# Altium PCB HHO.PcbDoc
Units mm, origin at the board's own origin, x right, y up, seen from the top; angles counter-clockwise.
Board outline 152.4 x 101.6 mm, 2 copper layers (Top Layer, Bottom Layer); 98 components, 57 nets, 291 pads, 184 vias.
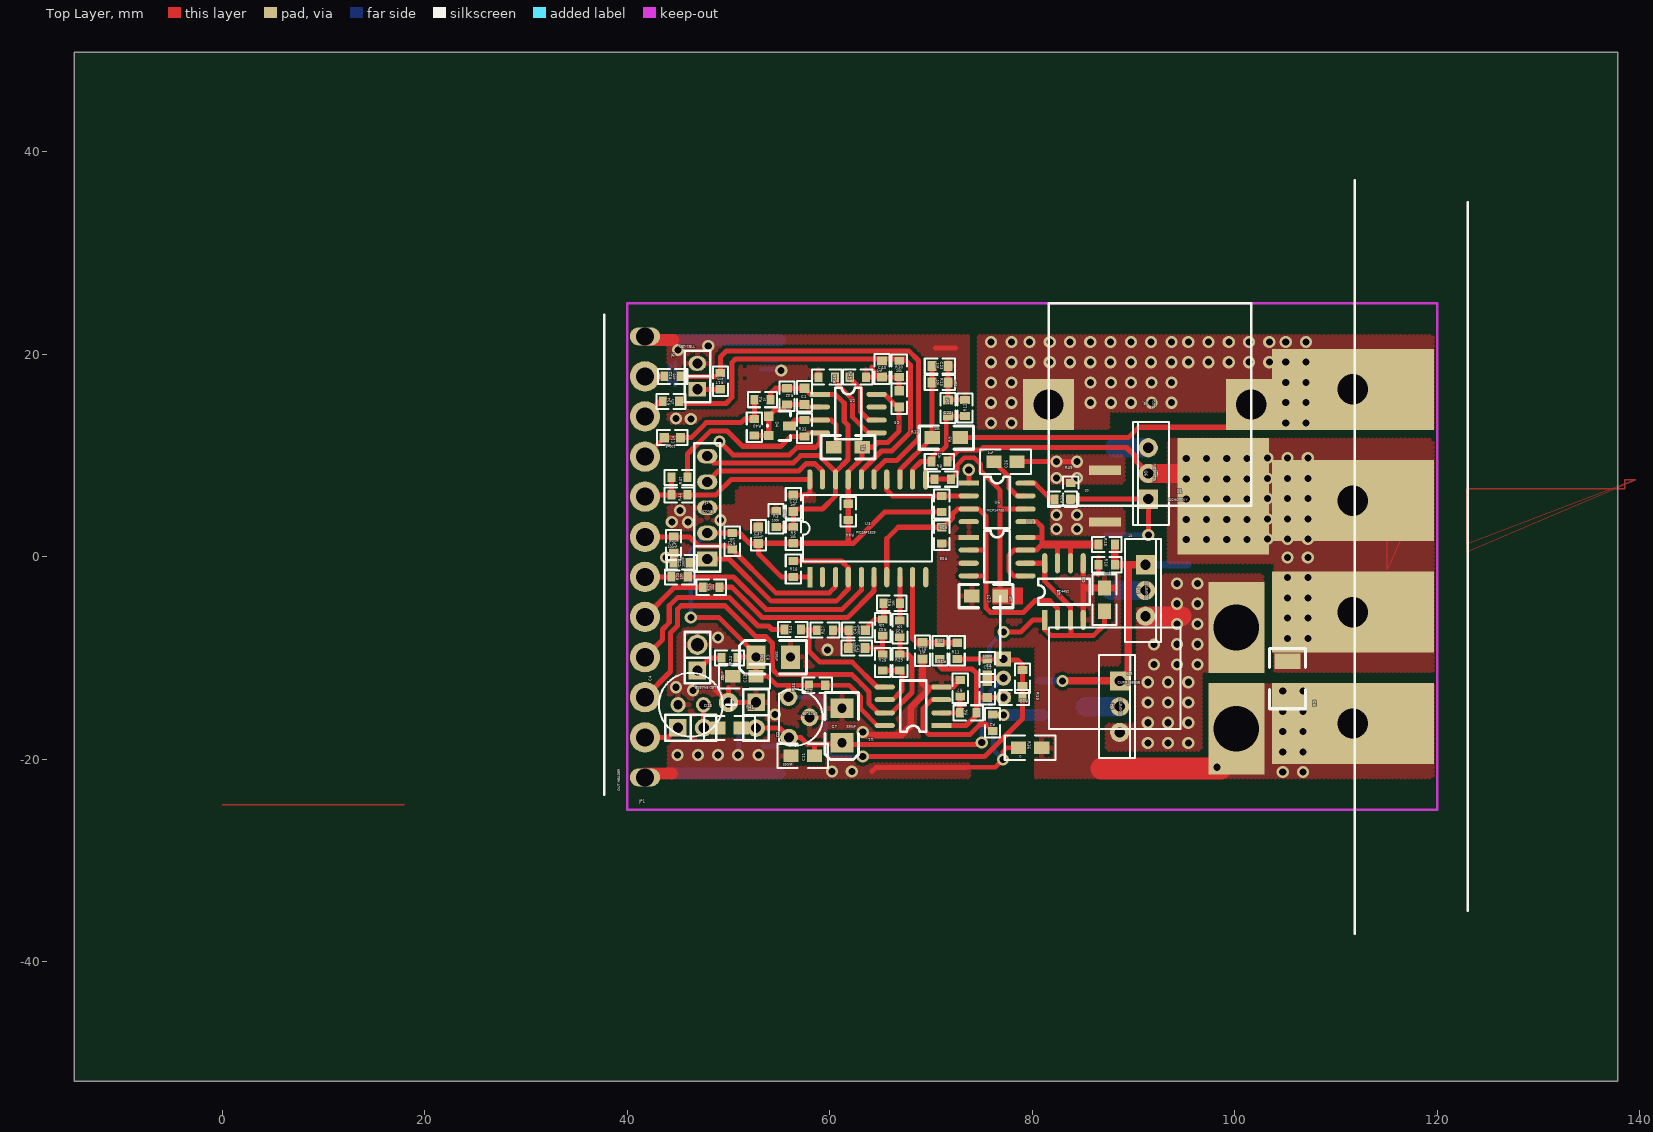
[diagram p0: Top Layer view]
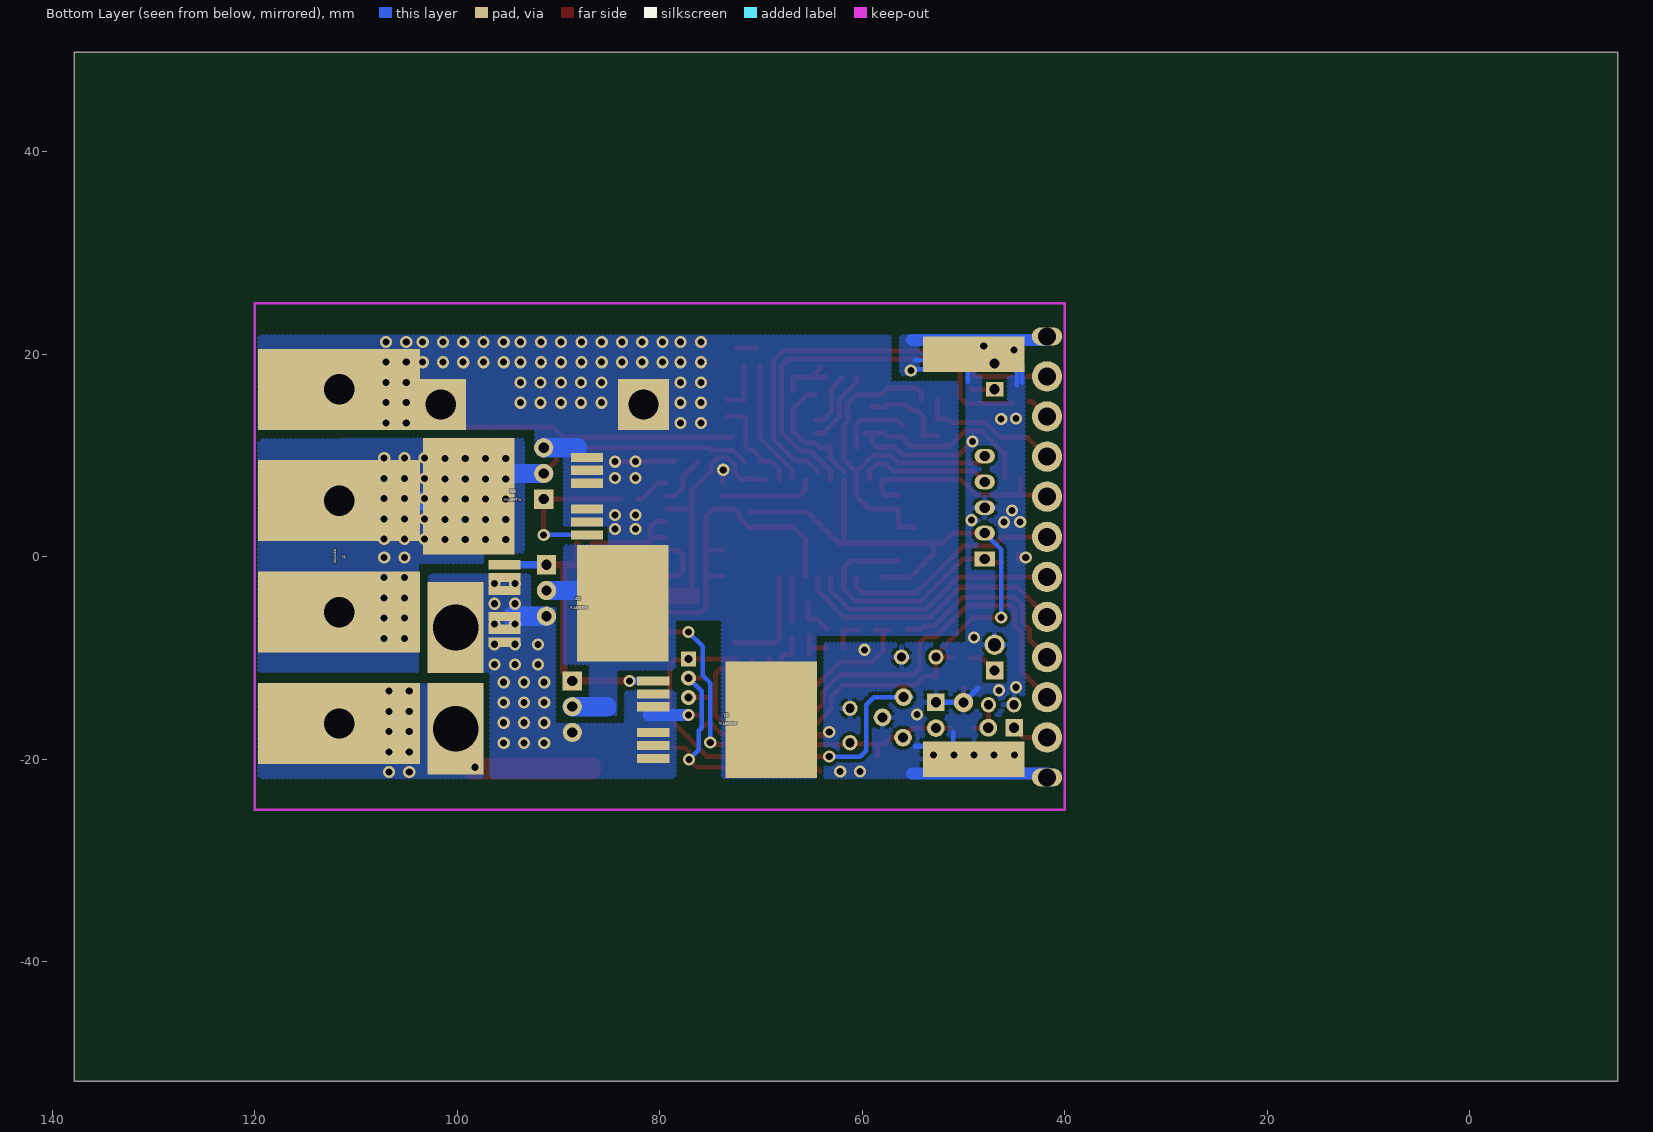
[diagram p1: Bottom Layer view, seen from below]

## Layer stack, top to bottom
Top Layer: signal copper 0.0356
Dielectric: dielectric 0.32, FR-4, Dk 4.8
Bottom Layer: signal copper 0.0356

## Board outline
-14.6,-51.8 137.8,-51.8 137.8,49.8 -14.6,49.8

## Design rules (kind name [scope] priority, off if disabled: settings)
Clearance "Clearance Keepout" [OnLayer('Keep-Out Layer')] p1: gap=0
Clearance [All] p2: gap=0.3
Clearance "Clearance Polygon" [All vs (IsPolygon)] p3: gap=0.5
ComponentClearance [All] p1 off: gap=0 collisioncheckmode=2
HoleSize [All] p1: absolutevalues=TRUE maxlimit=5 minlimit=0.7 maxpercent=80.000 minpercent=20.000
PolygonConnect PolygonConnect_PGND [InNet('PGND')] p1: connectstyle=Relief reliefconductorwidth=0.5 reliefentries=4 polygonreliefangle="90 Angle"
PolygonConnect PolygonConnectGND [InNet('GND')] p2: connectstyle=Relief reliefconductorwidth=0.5 reliefentries=4 polygonreliefangle="90 Angle"
PolygonConnect [All] p3: connectstyle=Direct reliefconductorwidth=0.5 reliefentries=4 polygonreliefangle="90 Angle"
RoutingLayers [All] p1: top layer=Horizontal bottom layer=Vertical
RoutingVias [All] p1: holewidth=0.711 width=1.27 viastyle="Through Hole" minholewidth=0.711 minwidth=1.27 maxholewidth=0.711 maxwidth=1.27
SolderMaskExpansion [All] p1: expansion=0.102
TestPointUsage [All] p1: valid=0 allowmultiple=FALSE
Testpoint [All] p1: side=15 testpointundercomponent=TRUE minsize=1.016 maxsize=2.54 preferedsize=1.524 minholesize=0 maxholesize=1.016 preferedholesize=0.813 testpointgrid=0.025 style=1023 order=1234567890
Width [All] p1: maxlimit=5 minlimit=0.254 preferedwidth=0.254 toplayer_minwidth=0.45 toplayer_prefwidth=0.5 bottomlayer_minwidth=0.45 bottomlayer_prefwidth=0.45 minimp=50.000000 maximp=50.000000 favimp=50.000000
15 further rules are at their usual default settings.

## Components (designator, comment, footprint, x,y, rotation, side; value= is the part's Value field where it differs from the comment)
C1 "470pF" "0603 CAP" 57.5,15.825 r90 top
C2 "100nF" "0603 CAP" 75.55,-13.1 r90 top (schematic designator C?)
C3 "1uF" 0805 87.125,-5.4 r90 top (schematic designator C?)
C4 "330uF" "RA 6.3MM" 47.525,-14.625 r180 top
C5 "100nF" "0603 CAP" 66.85,15.575 r270 top
C6 "1uF" 1210 105.2,-10.325 r270 top
C7 "330uF" "3528 + RA 6.3mm NOT ROUND" 61.2,-18.375 r270 top
C8 "330uF" "3528 + RA 6.3mm NOT ROUND" 52.725,-9.925 r180 top
C11 "330nF" 0805 58.475,-19.675 r180 top
C12 "100nF" 0805 52.725,-11.825 r180 top
C14 "100nF" "0603 CAP" 44.45,11.75 r0 top
C18 "1nF" "0603 CAP" 69.15,-9.3 r270 top
C19 "100nF" "0603 CAP" 75.55,-10.9 r270 top
C21 "1nF" "0603 CAP" 56.4,5.275 r90 top
C22 "1nF" "0603 CAP" 71.675,14.675 r90 top
C23 "1nF" "0603 CAP" 70.875,18.825 r0 top
C24 "100nF" "0603 CAP" 45.4,-0.6 r180 top
C26 "1uF" 0805 76.2,9.375 r0 top
C27 "1uF" 1005 76.825,-3.9 r180 top
C36 "100nF" "0603 CAP" 44.575,1.15 r270 top
C37 "100nF" "0603 CAP" 52.95,2.1 r90 top
C40 "100nF" "0603 CAP" 62.7,-7.25 r180 top
C41 "100nF" "0603 CAP" 62.675,-9.025 r180 top
C43 "1nF" "0603 CAP" 65.15,18.525 r270 top
D1 "SCHOTTKY" "D2-Pack - 3 - DIODE" 87.175,5.975 r0 top
D2 "ZENER1" SIP2#1 52.725,-14.375 r270 top
D3 "" "D2-Pack - 3 - DIODE" 87.175,5.975 r0 bottom (schematic designator D?)
D4 "DUAL DIODE BAV99" SOT-23 53.975,13.875 r270 top
D18 "DIODE" SIP2#1 45,-16.9 r0 top
J1 "CON5" SIP5 47.9,-0.225 r90 top
J2 "IOLOAD" "HD 11mm 4P HAMMOND" 111.647,16.525 r270 bottom
J3 "LED ENABLE" SIP2#2 46.925,-11.25 r90 top
J4 "COIL" "SIP2 - INDUCTOR 20A" 81.6,15.025 r0 top
J6 "LED CELL" SIP2#3 46.925,16.525 r90 top
JP1 "OUT HEADER" PWD12R 41.75,-21.8 r90 top
Q1 "MOSFET N" "D2-Pack - 7" 80.65,-16.1 r180 bottom
Q2 "MOSFET N" "D2-Pack - 7" 95.325,-4.625 r180 bottom
Q3 "MOSFET N" "D2-Pack - 7" 87.175,5.975 r0 bottom
Q4 "MOSFET N" TO220 88.625,-12.275 r270 top
Q5 "MOSFET N" TO220 91.175,-0.8 r270 top
Q6 "MOSFET N" TO220 91.45,5.675 r90 top
R1 "10k" 1005 63.2,10.8 r180 top
R2 "10k" "0603 RES" 76.075,-16.4 r90 top
R3 "100k" "0603 RES" 54.7,3.725 r270 top
R4 "1k" "0603 RES" 53.35,15.5 r180 top
R5 "10k" "0603 RES" 56.4,2.125 r90 top
R6 "10k" "0603 RES" 73.675,-15.425 r180 top
R7 "10k" "0603 RES" 72.875,-13 r90 top
R8 "10k" "0603 RES" 70.825,9.4 r180 top
R9 "10k" 1005 72.9,11.75 r180 top
R10 "10k" "0603 RES" 87.35,-0.8 r0 top
R11 "1k" "0603 RES" 72.575,-9.3 r90 top (schematic designator R?)
R12 "10k" "0603 RES" 73.35,14.675 r90 top
R13 "10k" 0603 70.875,17.2 r0 top
R14 "100k" "0603 RES" 56.349,-7.199 r180 top (schematic designator R?)
R15 "10" "0603 RES" 87.35,1.2 r0 top
R16 "1k" "0603 RES" 70.875,-9.3 r270 top
R17 "470" "0603 RES" 49.2,17.325 r270 top
R18 "10k" "0603 RES" 56.4,-1.225 r90 top
R19 "0" "0603 RES" 78.225,-13.9 r0 top
R20 "20" "0603 RES" 82.975,5.675 r0 top
R21 "10k" "0603 RES" 50.375,1.525 r270 top
R22 "470" "0603 RES" 44.475,17.8 r180 top
R23 "0" "0603 RES" 79.025,-12 r270 top
R24 "470" "0603 RES" 50.1,-10 r0 top
R25 "100" "0603 RES" 45.175,-2 r0 top
R26 "100" "0603 RES" 48.3,-3.025 r0 top
R27 "100k" "0603 RES" 59.525,-7.25 r180 top (schematic designator R?)
R28 "100k" "0603 RES" 65.225,-10.45 r270 top (schematic designator R?)
R29 "100k" "0603 RES" 66.925,-10.45 r270 top (schematic designator R?)
R30 "20k" "0603 RES" 66.85,18.525 r90 top
R31 "10k" "0603 RES" 66.125,-4.6 r0 top
R32 "10k" "0603 RES" 65.225,-7 r90 top
R33 "10k" "0603 RES" 57.5,12.675 r90 top
R34 "47k" "0603 RES" 44.325,15.325 r180 top
R35 "10k" "0603 RES" 66.925,-7.125 r90 top (schematic designator R?)
R36 "0" 0805 78.625,-18.875 r0 top
R37 "0" "0603 RES" 71.15,7.65 r0 top (schematic designator R?)
R38 "10k" "0603 RES" 71.05,2.1 r270 top
R39 "10k" "0603 RES" 71.05,5.2 r270 top
R40 "5k1" "0603 RES" 52.55,12.775 r270 top
R41 "100" 0805 48.95,-16.925 r0 top (schematic designator R?)
R42 "100k" "0603 RES" 55.775,15.825 r270 top (schematic designator R?)
R43 "0" "0603 RES" 58.75,-12.7 r180 top
R44 "0" "0603 RES" 61.825,4.425 r270 top
R45 "10k" "0603 RES" 59.7,17.725 r0 top
R46 "10k" "0603 RES" 62.775,17.725 r180 top
R47 "0" "0603 RES" 45.15,7.825 r180 top (schematic designator R?)
R48 "0" "0603 RES" 45.15,6.1 r180 top (schematic designator R?)
R49 "10k" "0603 RES" 83.8,6.475 r90 top
U1 "DUAL OPAMP" SO-8 71.025,-16.675 r180 top
U2 "DUAL OPAMP" SO-8 59.025,16.025 r0 top
U3 "PIC16F1828" SOIC20WIDE 58.025,-2.025 r90 top
U4 "TC4452" SO-8 81.225,-6.25 r90 top
U5 "CURR_SENSE" "5-CB WIDE" 77.15,-12 r0 top
U6 "MCP14700" SO-8 73.725,7.25 r0 top (schematic designator U7)
U7 "LM78L05" "TO-92 WIDE" 56.45,-15.875 r90 top
U8 "DRVFET_LowDual" SO-8 73.725,1.9 r0 top

## Footprints (in the part's own frame and the unit in brackets; to place one, negate y for a bottom-side part, rotate by r counter-clockwise, add the part's x,y. Pads: shape width x height; smd on the part's side, far side on the other; paste and mask are expansions set on the pad)
"5-CB WIDE" [mm]
  rect 1.5x1.5 hole 0.8: 1(0,1.9)
  round 1.5 hole 0.8: 2(0,0) 3(0,-1.9)
  rect 5.5x9 hole 4.5: 4(23,-5) 5(23,5)
  silkscreen extent 4.5,-5 17.5,5
0603 [mm]
  rect 0.9x0.95 smd: 1(-0.8,0) 2(0.8,0)
  silkscreen extent -1.5,-0.75 1.5,0.75
"0603 CAP" [mm]
  rect 0.9x0.95 smd: 1(-0.8,0) 2(0.8,0)
  silkscreen extent -1.5,-0.75 1.5,0.75
"0603 RES" [mm]
  rect 0.8x0.95 smd: 1(-0.8,0) 2(0.8,0)
  silkscreen extent -1.45,-0.75 1.45,0.75
0805 [mm]
  rect 1.5x1.25 smd: 1(0,0) 2(2.3,0)
  silkscreen extent -1.35,-1.2 3.65,1.2
1005 [mil]
  rect 60x50 smd: 1(0,0) 2(110,0)
  silkscreen extent -50,-45 160,45
1210 [mil]
  rect 60x100 smd: 1(0,0) 2(135,0)
  silkscreen extent -50,-70 185,70
"3528 + RA 6.3mm NOT ROUND" [mm]
  rect 1.9x2.3 smd: 1(0,0) 2(-3.4,0)
  round 1.5 hole 0.9: 1(0,0) 2(-3.4,0)
  silkscreen extent -4.95,-1.65 1.65,1.65
"D2-Pack - 3 - DIODE" [mm]
  rect 3.2x0.9 smd: 1(0,2.55) 1(0,-2.55)
  rect 9x11.5 smd: 2(11.675,0)
"D2-Pack - 7" [mm]
  rect 3.2x0.9 smd: 1(0,3.825) 3(0,-3.825) 3(0,-2.55) 3(0,-1.275) 3(0,1.275) 3(0,2.55)
  rect 9x11.5 smd: 2(11.675,0)
"HD 11mm 4P HAMMOND" [mm]
  rect 8x16 hole 3: 1(0,0) 2(11,0) 3(22,0) 4(33,0)
PWD12R [mm] "12 Pin 3.96mm Header"
  oval 1.8x3 hole 1.8: 1(0,0) 12(43.55,0)
  round 3 hole 1.8: 2(3.95,0) 3(7.925,0) 4(11.875,0) 5(15.85,0) 6(19.8,0) 7(23.75,0) 8(27.725,0) 9(31.675,0) 10(35.65,0) 11(39.6,0)
  silkscreen extent -1.7,4 45.7,4
"RA 6.3MM" [mm]
  round 1.5 hole 0.9: 1(0,0) 2(2.5,0)
  silkscreen extent -3.27,-3.15 4.4,3.15
SIP2#1 [mm]
  rect 1.75x1.75 hole 1: 1(0,0)
  round 1.75 hole 1: 2(2.55,0)
  silkscreen extent -1.27,-1.27 3.81,1.27
SIP2#2 [mm]
  rect 1.75x1.75 hole 1: 1(0,0)
  round 2 hole 1.3: 2(2.55,0)
  silkscreen extent -1.27,-1.27 3.81,1.27
SIP2#3 [mm]
  rect 1.45x1.75 hole 1: 1(0,0)
  oval 1.45x1.75 hole 1: 2(2.55,0)
  silkscreen extent -1.27,-1.27 3.81,1.27
"SIP2 - INDUCTOR 20A" [mm]
  rect 5x5 hole 3: 1(0,0) 2(20,0)
  silkscreen extent 0,-10 20,10
SIP5 [mm]
  rect 1.45x2 hole 1: 1(0,0)
  oval 1.45x2 hole 1: 2(2.55,0) 3(5.05,0) 4(7.6,0) 5(10.15,0)
  silkscreen extent -1.27,-1.27 11.43,1.27
SO-8 [mm]
  rect 2x0.5 smd: 1(0,0)
  oval 2x0.5 smd: 2(0,-1.25) 3(0,-2.55) 4(0,-3.8) 5(5.6,-3.8) 6(5.6,-2.55) 7(5.6,-1.25) 8(5.6,0)
  silkscreen extent 1.52,-4.44 4.06,0.64
SOIC20WIDE [mm]
  rect 2x0.5 smd: 1(0,0)
  oval 2x0.5 smd: 2(0,-1.25) 3(0,-2.55) 4(0,-3.8) 5(0,-5.1) 6(0,-6.35) 7(0,-7.6) 8(0,-8.9) 9(0,-10.15) 10(0,-11.45) 11(9.65,-11.45) 12(9.65,-10.15) 13(9.65,-8.9) 14(9.65,-7.6) 15(9.65,-6.35) 16(9.65,-5.1) 17(9.65,-3.8) 18(9.65,-2.55) 19(9.65,-1.25) 20(9.65,0)
  silkscreen extent 1.52,-12.06 8.13,0.65
SOT-23 [mil]
  rect 36x36 smd: 1(0,0) 3(75,0)
  rect 36x50 smd: 2(38,80)
  silkscreen extent -20,-5 95,85
TO220 [mm]
  rect 1.9x1.9 hole 1: 1(0,0)
  round 1.9 hole 1: 2(2.54,0) 3(5.08,0)
  silkscreen extent -2.54,-2.03 7.62,1.52
"TO-92 WIDE" [mm]
  round 1.75 hole 1: 1(-2,0.475) 2(0,-1.55) 3(2,0.525)
  silkscreen extent -2.8,-2.84 2.79,1.47

## Part data
C1 C2 C3 C5 C6 C11 C12 C14 C18 C19 C21 C22 C23 C24 C26 C27 C36 C37 C40 C41 C43: library part CAP, "Capacitor"
C4 C7 C8: library part "CAPACITOR POL", "Capacitor"
D1 D3: library part "DIODE SCHOTTKY", "Schottky Diode"
D2: "Zener Diode"
D18: "Diode"
J1: "Connector"
J2: library part CON6, "Connector"
J3 J4 J6: library part CON2, "Connector"
JP1: library part "12 HEADER", "12 Pin Header"
R1 R2 R3 R4 R5 R6 R7 R8 R9 R10 R11 R12 R13 R14 R15 R16 R17 R18 R19 R20 R21 R22 R23 R24 R25 R26 R27 R28 R29 R30 R31 R32 R33 R34 R35 R36 R37 R38 R39 R40 R41 R42 R43 R44 R45 R46 R47 R48 R49: library part RES1
U3: "Microchip Microcontroller"
U4: library part DRVFET_LowSingle, "Mosfet Low Side Single driver"
U5: "Current Sense Hall"
U6: library part DRVFET_14700, "Mosfet High and Low Side driver"
U7: library part VOLTREG
U8: "Mosfet Low Side Dual driver"

## Free pads (board coordinates)
  rect 10x3.5 smd far side: 0(48.975,-20) 0(48.975,20)
  round 1.9 hole 1: 0(50,-14.4)

## Via types
v1: diameter 1.2, hole 0.7, Top Layer to Bottom Layer, 184 vias

## Nets (pads, with @x,y where several pads share a name; then routed paths per layer and width w, separated by ;. In a path a pad name is that pad's centre, name@x,y a point inside that pad or via, vN(x,y) a via of type N, cw(c..) or ccw(c..) an arc to the next point about the centre after c; other vN are vias at no path point)
12V: C3.1 C7.1 C11.1 D2.2 R41.2 U4.1 U4.3 U4.8 U7.1 U8.6 | length 60
  Top Layer w0.5: R41.2 55.025,-16.925 U7.1 57.15,-17.875 57.8,-18.525 60.977,-18.493 C7.1@61.649,-18.486 ; C11.1 58.475,-18.525 ; C7.1@61.65,-18.55 74.8,-18.55 v1(75,-18.35) ; v1(77.15,-7.45) 78.85,-7.45 80.05,-6.25 U4.1 ; U8.6 U4.8 81.225,-2.425 83.775,-4.975 83.786,-6.25 83.799,-7.8 ; U4.1@81.225,-7.175 81.85,-7.8 86.025,-7.8 87.125,-6.7 C3.1
  Bottom Layer w0.45: v1(75,-18.35) 75,-12.475 75.739,-11.736 75.739,-8.861 v1(77.15,-7.45)
BOOT: C26.1 U6.7 | length 5.2
  Top Layer w0.5: C26.1 77.7,7.875 77.7,6.775 78.475,6 U6.7
CSFB: C18.1 R11.2 R16.1 U3.9 | length 10.6
  Top Layer w0.5: U3.9 68.175,-8.075 68.6,-8.5 R11.2
DRAIN: C26.2 D1.1 D3.1 J2.1 J4.1 J4.2 Q1.2 Q2.2 Q3.3 Q4.2 Q5.2 Q6.3 R9.1 R49.2 U6.1 | length 44
  Top Layer w0.5: R9.1 89.475,11.75 90.5,12.775 J4.2@99.875,12.775 ; U6.1 v1(73.725,8.575) ; C26.2 83.675,9.375
  Bottom Layer w1.9: 85.2,-14.825 Q4.2 ; Q2.2@87.84,-3.34 Q5.2 ; 88.115,10.755 Q6.3
  other v1: 82.4,2.725 84.4,2.725 82.4,4.125 84.4,4.125 82.4,7.775 84.4,7.775 84.4,9.375 82.4,9.4 75.925,13.2 77.925,13.2 105.025,13.2 107.025,13.2 75.925,15.2 77.925,15.2 85.75,15.2 87.75,15.2 89.75,15.2 91.75,15.2 93.75,15.2 105.025,15.2 107.025,15.2 75.925,17.2 77.925,17.2 85.75,17.2 87.75,17.2 89.75,17.2 91.75,17.2 93.75,17.2 105.025,17.2 107.025,17.2 75.925,19.2 77.925,19.2 79.725,19.2 81.725,19.2 83.725,19.2 85.725,19.2 85.725,19.2 87.725,19.2 89.725,19.2 91.725,19.2 93.725,19.2 95.4,19.2 97.4,19.2 99.4,19.2 101.4,19.2 103.4,19.2 105.025,19.2 107.025,19.2 75.925,21.2 77.925,21.2 79.725,21.2 81.725,21.2 83.725,21.2 85.725,21.2 85.725,21.2 87.725,21.2 89.725,21.2 91.725,21.2 93.725,21.2 95.4,21.2 97.4,21.2 99.4,21.2 101.4,21.2 103.4,21.2 105.025,21.2 107.025,21.2
ENABLE: D18.1 JP1.2 | length 3.6
  Top Layer w0.5: JP1.2 44.05,-17.85 D18.1
ENPOWER: C4.1 D18.2 R41.1 | length 3.7
  Top Layer w0.5: 47.525,-15.575 47.55,-15.6 ; C4.1@47.55,-14.65 D18.2 48.925,-16.9 R41.1
GATE: Q1.1 Q2.1 Q4.1 Q5.1 R10.2 R15.2 | length 29
  Top Layer w0.75: v1(82.975,-12.275) Q4.1 89.475,-11.425 89.475,-0.8 ; R15.2 R10.2 Q5.1
  Bottom Layer w0.75: Q1.1 v1(82.975,-12.275) ; Q5.1 Q2.1
GATE: 
GATEINV: Q3.1 Q6.1 R20.2 R49.1 | length 15.5
  Top Layer w0.5: R20.2 Q6.1 ; Q6.1@91.425,5.7 Q6.1 ; v1(91.45,2.15) Q6.1
  Bottom Layer w0.45: Q3.1 v1(91.45,2.15)
GATEOUT: R15.1 U4.6 U4.7 U6.5 U8.5 U8.7 U8.8 | length 21.3
  Top Layer w0.5: U8.5 78.175,-1.9 77.7,-1.425 77.7,0.125 78.225,0.65 80.4,0.65 80.95,1.2 80.95,2.925 80.425,3.45 U6.5 ; U8.8 80.9,1.9 80.95,1.85 ; U4.7 82.475,1.175 ; U4.6 83.775,1.2
  Top Layer w0.75: 81.2,1.2 R15.1
GATEOUTINV: R20.1 U6.8 | length 3.5
  Top Layer w0.5: U6.8 80.25,7.25 81.825,5.675 R20.1
GND: C2.2 C4.2 C5.1 C7.2 C8.2 C11.2 C12.2 C18.2 C19.2 C21.2 C22.2 C23.2 C24.2 C36.2 C37.2 C40.2 C41.2 C43.2 D2.1 J1.3 J3.2 J6.2 JP1.1 JP1.8 JP1.12 pad.0 R3.1 R7.2 R12.2 R13.2 R27.1 R30.1 R33.1 R36.1 R45.1 R46.1 R47.1 R47.2 R48.1 R48.2 U1.4 U2.4 U3.20 U5.2 U7.2 | length 167.1
  Top Layer w0.45: 64.125,18.675 64.142,18.727 64.15,18.75 ; 64.15,18.725 64.15,18.55 C43.2@64.675,18.025 ; C43.2 R30.1 ; 70.4,20.6 72.425,20.6 ; C22.2 R12.2 ; 73.4,-20.8 76.325,-20.8 v1(77.1,-20.025) 77.1,-19.25 77.475,-18.875 R36.1
  Top Layer w0.5: JP1.8 41.925,6.1 48.75,6.1 50.275,7.625 U3.20 58.025,6.35 57.75,6.075 C21.2 ; v1(43.85,-0.075) C36.2@44.575,-0.075 ; R48.2 R47.2 ; C24.2@44.575,-0.575 C36.2 ; R47.1 45.95,10.125 48.25,12.425 49.85,12.425 51.375,10.9 55.175,10.9 56.15,11.875 R33.1 57.85,12.225 U2.4@59.775,12.225 ; 48.475,-12.9 50,-14.425 50,-12.925 ; v1(49.125,11.375) 50.45,10.05 56.025,10.05 56.775,10.8 58.6,10.8 59.025,11.225 U2.4 ; pad.0@50,-14.4 D2.1@52.7,-14.4 ; R27.1 C40.2 C41.2@61.9,-9 ; v1(63.25,-17.325) v1@63.425,-17.5 ; R46.1 C43.2 ; 64.15,-21.225 64.575,-20.8 73.4,-20.8 ; C5.1 R30.1 ; 69.65,-13.25 70.025,-12.875 72.2,-12.875 R7.2 ; C22.2 C23.2 ; C19.2@75.55,-12 U5.2
  Top Layer w0.65: v1(63.25,-17.325) 63.575,-17.65 67.05,-17.65 67.975,-16.725 67.975,-14.925 69.65,-13.25 69.65,-12.975 69.15,-12.475 C18.2
  Top Layer w1.2: JP1.1@41.7,-21.4 44.4,-21.4 ; JP1.12@41.875,21.375 44.575,21.375
  Bottom Layer w0.45: 44.75,16.925 pad.0@44.75,19.2 ; pad.0@51,-18.925 51,-17.325 ; pad.0@53.2,18.525 54.5,18.525 ; pad.0@53.3,19.375 54.8,19.375 ; v1(77.1,-20.025) 76.15,-19.075 76.15,-17.2 75.848,-16.898 75.848,-13.302 U5.2
  Bottom Layer w0.5: 44.225,17.175 pad.0@44.225,18.8 ; 48.575,-12.975 pad.0@50,-14.4 ; 49.55,17.275 pad.0@49.55,18.8 ; pad.0@50.025,-14.375 D2.1 ; pad.0@53.4,-18.725 54.711,-18.725
  Bottom Layer w1.2: JP1.1@41.7,-21.4 55.1,-21.4 ; JP1.12@41.875,21.375 55.1,21.375
  other v1: 60.225,-21.2 62.175,-21.2 44.95,-19.6 47,-19.6 48.975,-19.6 50.925,-19.6 52.975,-19.6 54.575,-15.6 46.5,-13.2 44.8,-12.9 59.775,-9.2 48.975,-8 46,3.4 44.4,3.425 49.2,3.6 45.2,4.55 46.275,13.6 44.8,13.625 55.2,18.37 45.025,20.4 48,20.8
HALL: C43.1 R30.2 R34.1 U3.16 | length 40.8
  Top Layer w0.5: R34.1@45.125,15.125 49.75,15.125 50.325,15.7 50.325,19.15 50.7,19.525 67.35,19.525 67.95,18.925 67.95,12.25 66.125,10.425 65.1,10.425 63.125,8.45 U3.16
INDICATION: R17.1 R22.1 U3.15 | length 39.3
  Top Layer w0.5: R22.1 48.875,17.8 R17.1 49.2,19.725 49.8,20.325 67.8,20.325 68.75,19.375 68.75,11.65 66.6,9.5 65.475,9.5 U3.15@64.375,8.4
IOUT: C2.1 R6.1 R16.2 R19.1 U1.1 U5.3 | length 15.3
  Top Layer w0.5: R16.2 70.875,-10.875 71.1,-11.1 74.05,-11.1 74.475,-11.525 74.475,-15.65 73.45,-16.675 U1.1 ; 74.475,-13.9 U5.3
KNOCK: C14.1 C14.2 JP1.9 R4.2 R40.1 | length 14.3
  Top Layer w0.5: JP1.9 41.775,9.875 C14.1 46.325,11.75 47.8,13.225 51.225,13.225 51.575,13.575 R40.1 R4.2
LED: J3.1 R24.1 | length 2.9
  Top Layer w0.5: J3.1 48.175,-10 R24.1
LEDCELL: J6.1 R17.2 | length 2.3
  Top Layer w0.5: J6.1 R17.2
LEDOUT: JP1.11 R22.2 | length 1.9
  Top Layer w0.5: JP1.11 R22.2
MAPAMP+: R14.1 R27.2 U1.5 | length 12.6
  Top Layer w0.5: R14.1@57.2,-7.25 R27.2 ; 57.95,-7.25 57.95,-9.35 59.025,-10.425 62.221,-10.425 64.671,-12.875 U1.5
MAPAMP-: R28.2 R29.2 U1.6 | length 5.8
  Top Layer w0.5: R28.2 R29.2 67.125,-11.45 67.125,-13.225 66.225,-14.125 U1.6
MAPFALL: C41.1 R28.1 R32.1 | length 3.6
  Top Layer w0.5: C41.1 65.2,-9.025 ; R28.1 R32.1
MAPIN: JP1.4 R14.2 | length 19.1
  Top Layer w0.5: JP1.4 43.475,-8.2 43.475,-7.194 44.15,-6.519 44.15,-4.85 44.95,-4.05 50.1,-4.05 52.9,-6.85 53.95,-6.85 54.299,-7.199 R14.2
MAPOUT: JP1.3 R29.1 R35.1 U1.7 | length 46.5
  Top Layer w0.5: JP1.3 44.275,-11.35 44.275,-7.525 44.95,-6.85 44.95,-5.225 45.325,-4.85 49.65,-4.85 52.711,-7.911 53.711,-7.911 54.35,-8.55 54.35,-11.15 54.85,-11.65 62.196,-11.65 63.156,-12.61 63.825,-13.279 63.825,-13.35 63.85,-13.375 63.85,-14.5 64.775,-15.425 U1.7 ; U1.7@66.125,-15.425 68.125,-13.425 68.125,-10.05 67.725,-9.65 R29.1 R35.1
MAPOUTMCU: R31.2 R35.2 U3.8 | length 4.3
  Top Layer w0.5: R35.2 U3.8
MCLR: C24.1 J1.1 R18.2 U3.4 | length 25.8
  Top Layer w0.5: C24.1 47.525,-0.6 J1.1 50.05,-0.225 54.225,-4.4 60.625,-4.4 61.825,-3.2 61.825,-1.1 61.15,-0.425 R18.2
NetC40_1: C40.1 R31.1 R32.2 | length 3.7
  Top Layer w0.5: C40.1@63.525,-7.125 64.45,-6.2 R32.2 65.325,-6.1 R31.1
NetD4_A: 
NetR2_1: R2.1 U1.3 | length 12
  Top Layer w0.5: U1.3 70.075,-14.125 69.225,-14.975 69.225,-17 69.8,-17.575 73.825,-17.575 74.85,-16.55 75.425,-16.55 R2.1
NetR6_1: 
NetR6_1: 
NetR6_2: R6.2 R7.1 U1.2 | length 3.5
  Top Layer w0.5: U1.2 R6.2 R7.1
NetR6_2: 
NetR45_2: R45.2 U2.5 | length 7.7
  Top Layer w0.5: R45.2 60.5,17.275 62.225,15.55 62.225,13.8 63.8,12.225 U2.5
NetR46_2: R46.2 U2.6 | length 5.8
  Top Layer w0.5: R46.2 61.975,17.65 63.05,16.575 63.05,14.3 63.875,13.475 U2.6
OP+: D4.2 R1.2 R33.2 U2.3 | length 7
  Top Layer w0.5: D4.2 56.572,13.475 R33.2 ; R33.2@57.825,13.475 60.175,13.475 60.625,13.025 60.625,11.019 R1.2
OP-: C1.1 D4.1 D4.3 R40.2 R42.2 U2.2 | length 9
  Top Layer w0.5: R40.2 53.97,11.975 53.975,11.98 D4.1 54.575,14.475 55.225,14.475 R42.2 C1.1 57.75,14.775 U2.2
PCLK: C1.2 C21.1 J1.5 R3.2 R4.1 R5.2 R42.1 U2.1 U3.18 | length 40.6
  Top Layer w0.5: J1.5@47.95,9.975 J1.5 48.575,9.25 56.4,9.25 57.125,9.975 58.95,9.975 U3.18@60.575,8.35 ; R4.1 54.15,16.125 54.65,16.625 R42.1 C1.2 58.1,16.025 60.55,16.025 61.425,15.15 61.425,13.35 61.8,12.975 61.8,9.6 60.575,8.375 60.575,6 59.275,4.7 56.4,4.7 R5.2 R3.2@54.8,2.925
PDAT: J1.4 U3.19 | length 13.2
  Top Layer w0.5: J1.4 48.975,8.45 56.925,8.45 57.65,9.175 58.55,9.175 59.275,8.45 U3.19
PEAK: 
PGND: C3.2 C6.2 C27.2 J2.4 R10.1 R36.2 R38.2 U4.4 U4.5 U5.4 U6.4 U8.1 U8.3 | length 21.2
  Top Layer w0.45: 86.525,-1.8 R10.1
  Top Layer w0.5: U4.4 U4.5
  Top Layer w0.65: 85.25,-3.1 88.075,-3.1
  Top Layer w2.15: 86.8,-20.925 U5.4@98.6,-20.925
  other v1: 104.724,-21.275 106.725,-21.275 98.25,-20.8 104.724,-19.275 106.725,-19.275 104.724,-17.275 106.725,-17.275 104.724,-15.275 106.725,-15.275 104.724,-13.275 106.725,-13.275
POWER: C6.1 D1.2 D3.2 J2.2 J2.3 Q3.2 Q6.2 R8.1 | length 46.8
  Top Layer w0.5: R8.1 72.775,10.55 74.925,10.55 75.15,10.775 89.3,10.775 90.175,9.9 90.175,9.49 Q6.2
  Top Layer w1.9: Q6.2 D1.2@95.165,8.215
  Bottom Layer w1.9: Q6.2 D3.2@95.665,8.215 ; D3.2@95.95,8.675 99.125,5.5 J2.2@111.775,5.5
  other v1: 105.2,-8.075 107.2,-8.075 105.2,-6.075 107.2,-6.075 105.2,-4.075 107.2,-4.075 105.2,-2.075 107.2,-2.075 105.2,-0.075 107.2,-0.075 95.2,1.675 97.199,1.675 99.2,1.675 101.199,1.675 103.2,1.725 105.2,1.725 105.2,1.725 107.2,1.725 95.2,3.675 97.2,3.675 99.199,3.675 101.199,3.675 103.2,3.725 105.2,3.725 105.2,3.725 107.2,3.725 95.199,5.675 97.199,5.675 99.199,5.675 101.2,5.675 103.2,5.725 105.2,5.725 105.2,5.725 107.2,5.725 95.2,7.675 97.199,7.675 99.2,7.675 101.2,7.675 103.2,7.725 105.2,7.725 105.2,7.725 107.2,7.725 95.199,9.675 97.2,9.675 99.199,9.675 101.199,9.675 103.2,9.725 105.2,9.725 105.2,9.725 107.2,9.725
PWM: R38.1 U3.7 U4.2 U6.3 U8.2 U8.4 | length 36.9
  Top Layer w0.5: U3.7 65.625,1.775 66.75,2.9 71.225,2.9 72.125,3.8 72.125,4.2 72.625,4.7 74.7,4.7 75.164,4.236 75.425,3.975 75.425,-5.05 75.875,-5.5 79.125,-5.5 80.272,-4.353 81.728,-4.353 82.475,-5.1 U4.2 ; U8.4 75.425,-1.9 ; U8.2 75.4,0.65
PWMINV: R39.1 U3.14 U6.2 | length 9.4
  Top Layer w0.5: U3.14 65.625,6.575 66.2,6 U6.2
REFPWM: 
RPM: JP1.10 R34.2 | length 2.4
  Top Layer w0.5: JP1.10 43.225,15.325 R34.2
RX: JP1.6 R25.1 R25.2 U3.5 | length 24.8
  Top Layer w0.5: JP1.6@41.75,-2.025 JP1.6 50.5,-2 53.7,-5.2 61.225,-5.2 62.946,-3.479 63.125,-3.3 U3.5
SOURCE: Q1.3 Q2.3 Q4.3 Q5.3 R2.2 U5.5 | length 11.9
  Top Layer w0.5: R2.2@76.1,-15.625 v1(77.15,-15.625)
  Top Layer w1.9: Q5.3 94.77,-5.88
  Bottom Layer w1.2: v1(77.15,-15.625) 81.085,-15.625
  Bottom Layer w1.9: Q5.3 Q2.3@94.51,-5.88
  other v1: 91.4,-18.4 93.4,-18.4 95.4,-18.4 91.4,-16.4 93.4,-16.4 95.4,-16.4 91.4,-14.4 93.4,-14.4 95.4,-14.4 91.4,-12.4 93.4,-12.4 95.4,-12.4 92,-10.65 94.3,-10.65 96.3,-10.65 92,-8.675 94.3,-8.65 96.3,-8.65 94.3,-6.65 96.3,-6.65 94.3,-4.65 96.3,-4.65 94.3,-2.65 96.3,-2.65
TEMPCELL: 
TEMPCELL: C36.1 JP1.7 R21.2 U3.3 | length 22.3
  Top Layer w0.5: JP1.7 46.15,1.95 47.05,1.05 50.05,1.05 54.675,-3.575 59.95,-3.575 60.575,-2.95 U3.3
TESTOUT: 
TX: JP1.5 R26.1 R26.2 U3.6 | length 27.6
  Top Layer w0.5: JP1.5@41.825,-6.025 JP1.5 44.675,-3.025 50.35,-3.025 53.35,-6.025 61.75,-6.025 64.375,-3.4 U3.6
VCC: C5.2 C8.1 C12.1 C19.1 C37.1 J1.2 R1.1 R5.1 R11.1 R18.1 R19.2 R21.1 R23.1 R23.2 R24.2 R39.2 R43.1 R43.2 R44.1 R44.2 U1.8 U2.8 U3.1 U3.17 U5.1 U7.3 | length 130.7
  Top Layer w0.45: C12.1@52.825,-11.925 C12.1 53.875,-11.825 54.75,-12.7 R43.2 61.925,-12.7 63.05,-13.825 63.05,-15.025 64.7,-16.675 U1.8 ; U7.3 55.925,-12.725
  Top Layer w0.5: v1(46.275,-6.025) 49.075,-6.025 52.725,-9.675 C12.1 ; J1.2 R21.1 51.075,2.325 52.1,1.3 C37.1 52.95,0.275 55.25,-2.025 U3.1 ; R24.2@50.975,-9.925 C8.1@52.725,-9.925 ; C12.1@52.675,-11.225 C12.1@52.725,-11.275 ; C37.1@52.975,1.325 62.35,1.325 65.425,4.4 R39.2 ; 61.825,1.325 U3.17 ; U3.17@61.825,8.375 63.2,9.75 R1.1 64.25,10.8 64.7,11.25 65.7,11.25 66.85,12.4 66.85,14.575 66.725,14.575 C5.2@66.687,14.613 ; v1(63.25,-19.75) 75.275,-19.75 79.025,-16 79.025,-10.7 78.525,-10.2 U5.1@77.125,-10.2 ; U2.8 65.4,16.025 66.65,14.775 C5.2 ; R11.1 U5.1
  Bottom Layer w0.45: v1(46.275,-6.025) 46.275,0.7 J1.2 ; U7.3@55.175,-13.875 58.861,-13.875 59.6,-14.614 59.6,-19.15 60.2,-19.75 v1(63.25,-19.75)
VCC_DRV: C27.1 R37.1 R37.2 U3.11 U6.6 | length 23.3
  Top Layer w0.45: R37.2 72.575,8.275 72.575,9.05 73.275,9.75 74.275,9.75 74.9,9.125 74.9,8.475
  Top Layer w0.5: U3.11 70.325,7.625 R37.1 R37.2 ; 74.9,8.475 76.825,6.55 C27.1 ; 76.825,4.7 U6.6
VCC_PIN: 
VIN: C22.1 R8.2 R12.1 U3.12 | length 10.2
  Top Layer w0.45: R8.2 70.025,9.775 70.75,10.5 71.1,10.5 71.5,10.9 71.5,13.7 C22.1 R12.1
  Top Layer w0.5: U3.12 68.175,8.575 69,9.4 R8.2
VOUT: C23.1 R9.2 R13.1 U3.13 | length 12.5
  Top Layer w0.5: U3.13 66.925,8.569 R9.2 70.106,18.794 C23.1
pads on no net: U2.7 U3.2 U3.10

## Polygon pours and split planes (outlines as drawn)
PGND on Top Layer (hatched 90Degree grid 0.4 track 0.45): 88.575,-1.95 86.1,-1.95 86.1,-10.65 88.575,-10.65
DRAIN on Top Layer (hatched 90Degree grid 0.4 track 0.45, remove dead copper): 86.8,14.4 106,14.4 106,21.75 86.8,21.75
DRAIN on Top Layer (hatched 90Degree grid 0.4 track 0.45, remove dead copper): 87.475,21.75 74.725,21.75 74.725,12.725 87.475,12.725
PGND on Top Layer (hatched 90Degree grid 0.4 track 0.45, remove dead copper): 81.55,-21.775 99.2,-21.775 99.2,-20.075 81.55,-20.075
DRAIN on Top Layer (hatched 90Degree grid 0.4 track 0.45, remove dead copper): 119.55,21.75 103.975,21.75 103.975,12.75 119.55,12.75
DRAIN on Top Layer (hatched 90Degree grid 0.4 track 0.45): 81.9,2.225 89.025,2.225 89.025,4.675 81.9,4.675
DRAIN on Top Layer (hatched 90Degree grid 0.4 track 0.45): 81.925,7.275 89,7.275 89,9.9 81.925,9.9
SOURCE on Top Layer (hatched 90Degree grid 0.4 track 0.45): 92.875,-11.274 102.675,-11.274 102.675,-1.825 92.875,-1.825
POWER on Top Layer (hatched 90Degree grid 0.4 track 0.45): 104,-11.274 119.549,-11.274 119.549,2.75 104,2.75
POWER on Top Layer (hatched 90Degree grid 0.4 track 0.45): 119.55,11.525 93.475,11.525 93.475,-0.55 119.55,-0.55
DRAIN on Top Layer (hatched 90Degree grid 0.4 track 0.45, remove dead copper): 115.05,-1.25 115.05,5.95 118.3,5.95
DRAIN on Top Layer (hatched 90Degree grid 0.4 track 0.45, remove dead copper): 115.05,-1.25 115.05,5.95 118.3,5.95
DRAIN on Top Layer (hatched 90Degree grid 0.4 track 0.45, remove dead copper): 122.9,1.2 122.9,6.7 138.5,6.7 138.5,7.6 139.6,7.6
DRAIN on Top Layer (hatched 90Degree grid 0.4 track 0.45, remove dead copper): 122.9,0.5 139.6,7.6 138.5,7.6 138.5,6.7 122.9,6.7
GND on Top Layer (hatched 90Degree grid 0.4 track 0.45, remove dead copper): 0,-24.5 18,-24.5 18,-24.45
PGND on Top Layer (hatched 90Degree grid 0.4 track 0.45, remove dead copper): 97.6,-21.775 119.55,-21.775 119.55,-12.7 97.6,-12.7
SOURCE on Top Layer (hatched 90Degree grid 0.4 track 0.45): 90.425,-19.075 96.65,-19.075 96.65,-5.15 90.425,-5.15
SOURCE on Top Layer (hatched 90Degree grid 0.4 track 0.45): 96.65,-19.075 96.65,-16.6 87.35,-16.6 87.35,-19.075
PGND on Top Layer (hatched 90Degree grid 0.4 track 0.45, remove dead copper): 70.775,-8.8 88.575,-8.8 88.575,3.525 70.775,3.525
GND on Top Layer (hatched 90Degree grid 0.4 track 0.45, remove dead copper): 44.1,-8.9 64.65,-8.9 64.65,4.975 44.1,4.975
GND on Top Layer (hatched 90Degree grid 0.4 track 0.45, remove dead copper): 50.825,4.15 58.475,4.15 58.475,6.775 50.825,6.775
GND on Top Layer (hatched 90Degree grid 0.4 track 0.45, remove dead copper): 44.075,13.2 73.6,13.2 73.6,21.75 44.075,21.75
PGND on Top Layer (hatched 90Degree grid 0.4 track 0.45, remove dead copper): 80.375,-21.775 86.375,-21.775 86.375,-4.875 80.375,-4.875
GND on Top Layer (hatched 90Degree grid 0.4 track 0.45, remove dead copper): 44.1,-21.775 73.775,-21.775 73.775,-7.675 44.1,-7.675
DRAIN on Bottom Layer (hatched 90Degree grid 0.4 track 0.45, remove dead copper): 83.05,15.5 83.05,10.75 92.175,10.75 92.175,15.5
DRAIN on Bottom Layer (hatched 90Degree grid 0.4 track 0.45, remove dead copper): 104.475,21.75 88.9,21.75 88.9,12.75 104.475,12.75
DRAIN on Bottom Layer (hatched 90Degree grid 0.4 track 0.45): 50.65,7.2 58.65,7.2 58.65,17.15 50.65,17.15
DRAIN on Bottom Layer (hatched 90Degree grid 0.4 track 0.45, remove dead copper): 119.55,21.75 103.975,21.75 103.975,12.75 119.55,12.75
POWER on Bottom Layer (hatched 90Degree grid 0.4 track 0.45, remove dead copper): 111.524,-0.55 111.524,3.575 97.5,3.575 97.5,-0.55
POWER on Bottom Layer (hatched 90Degree grid 0.4 track 0.45, remove dead copper): 111.424,0.475 111.424,11.525 93.45,11.525 93.45,0.475
DRAIN on Bottom Layer (hatched 90Degree grid 0.4 track 0.45): 50.65,-7.625 68.4,-7.625 68.4,0.075 50.65,0.075
DRAIN on Bottom Layer (hatched 90Degree grid 0.4 track 0.45, remove dead copper): 64.675,-21.775 73.775,-21.775 73.775,-4.975 64.675,-4.975
DRAIN on Bottom Layer (hatched 90Degree grid 0.4 track 0.45, remove dead copper): 78.55,-11.075 86.4,-11.075 86.4,1 78.55,1
DRAIN on Bottom Layer (hatched 90Degree grid 0.4 track 0.45, remove dead copper): 57.275,3.175 89.375,3.175 89.375,21.75 57.275,21.75
DRAIN on Bottom Layer (hatched 90Degree grid 0.4 track 0.45, remove dead copper): 84.4,-15.55 86.8,-15.55 86.8,-8.525 84.4,-8.525
SOURCE on Bottom Layer (hatched 90Degree grid 0.4 track 0.45, remove dead copper): 78.5,-17.6 83.35,-17.6 83.35,-13.325 78.5,-13.325
SOURCE on Bottom Layer (hatched 90Degree grid 0.4 track 0.45, remove dead copper): 78.5,-16.6 78.5,-21.775 94.075,-21.775 94.075,-16.6
SOURCE on Bottom Layer (hatched 90Degree grid 0.4 track 0.45, remove dead copper): 96.65,-5.15 90.425,-5.15 90.425,-21.775 96.65,-21.775
PGND on Bottom Layer (hatched 90Degree grid 0.4 track 0.45, remove dead copper): 119.55,-12.7 97.575,-12.7 97.575,-21.775 119.55,-21.775
SOURCE on Bottom Layer (hatched 90Degree grid 0.4 track 0.45, remove dead copper): 102.675,-11.275 102.675,-1.825 92.875,-1.825 92.875,-11.275
POWER on Bottom Layer (hatched 90Degree grid 0.4 track 0.45, remove dead copper): 119.55,-11.275 119.55,11.5 103.975,11.5 103.975,-11.275
GND on Bottom Layer (hatched 90Degree grid 0.4 track 0.45, remove dead copper): 49.6,-14.875 49.6,21.75 44.075,21.75 44.075,-14.875
GND on Bottom Layer (hatched 90Degree grid 0.4 track 0.45, remove dead copper): 44.075,-21.775 63.625,-21.775 63.625,-8.625 44.075,-8.625
DRAIN on Bottom Layer (hatched 90Degree grid 0.4 track 0.45, remove dead copper): 85.9,-10.5 89.35,-10.5 89.35,1 85.9,1
GND on Bottom Layer (hatched 90Degree grid 0.4 track 0.45): 44.05,18 56.2,18 56.2,21.75 44.05,21.75
DRAIN on Bottom Layer (hatched 90Degree grid 0.4 track 0.45, remove dead copper): 50.65,-6.125 84.925,-6.125 84.925,10.4 50.65,10.4
POWER on Top Paste (hatched 90Degree grid 0.4 track 0.45, remove dead copper): 104,-11.275 119.55,-11.275 119.55,-9.275 104,-9.275
SOURCE on Top Paste (hatched 90Degree grid 0.4 track 0.45, remove dead copper): 96.65,-19.075 87.325,-19.075 87.325,-16.6 96.65,-16.6
SOURCE on Top Paste (hatched 90Degree grid 0.4 track 0.45, remove dead copper): 92.875,-11.275 92.875,-2.725 100.65,-2.725 100.65,-11.275
SOURCE on Top Paste (hatched 90Degree grid 0.4 track 0.45, remove dead copper): 90.425,-19.075 90.425,-5.15 96.65,-5.15 96.65,-19.075
NetR46_2 on Top Paste (hatched 90Degree grid 0.4 track 0.45, remove dead copper): 99.325,-12.725 109.325,-12.725 109.325,-20.25 99.325,-20.25
POWER on Top Paste (hatched 90Degree grid 0.4 track 0.45, remove dead copper): 99.55,9.3 109.55,9.3 109.55,1.725 99.55,1.725
DRAIN on Bottom Paste (hatched 90Degree grid 0.4 track 0.45, remove dead copper): 88.8,10.75 92.175,10.75 92.175,13.15 88.8,13.15
DRAIN on Bottom Paste (hatched 90Degree grid 0.4 track 0.45, remove dead copper): 67.2,17.587 85.059,16.866 85.059,14.067 88.256,14.067 88.256,12.725 111.6,12.725 111.6,21.75 67.2,21.75
DRAIN on Bottom Paste (hatched 90Degree grid 0.4 track 0.45, remove dead copper): 64.7,21.75 73.775,21.75 73.775,-21.775 64.7,-21.775
DRAIN on Bottom Paste (hatched 90Degree grid 0.4 track 0.45, remove dead copper): 89.381,17.5 89.381,3.175 71.375,3.175 71.375,17.488 89.65,17.488
DRAIN on Bottom Paste (hatched 90Degree grid 0.4 track 0.45, remove dead copper): 84.95,-6.105 72.525,-6.105 72.525,3.6 84.939,3.6 84.939,-6.25
SOURCE on Bottom Paste (hatched 90Degree grid 0.4 track 0.45, remove dead copper): 83.402,-13.3 83.402,-21.775 78.491,-21.775 78.491,-13.307 83.475,-13.307
no net on Bottom Paste (hatched 90Degree grid 0.4 track 0.45, remove dead copper): 78.55,1.025 89.35,1.025 89.35,-11.075 78.55,-11.075
no net on Bottom Paste (hatched 90Degree grid 0.4 track 0.45, remove dead copper): 89.6,10 91.6,10 91.6,12 89.6,12
no net on Bottom Paste (hatched 90Degree grid 0.4 track 0.45, remove dead copper): 91.525,7.5 93.525,7.5 93.525,8.925 91.525,8.925
no net on Bottom Paste (hatched 90Degree grid 0.4 track 0.45, remove dead copper): 93.475,0.475 99.2,0.475 99.2,11.5 93.475,11.5
SOURCE on Bottom Paste (hatched 90Degree grid 0.4 track 0.45, remove dead copper): 97.322,-1.825 97.322,-11.2 95.425,-11.2 95.425,-1.833 97.35,-1.833
no net on Bottom Paste (hatched 90Degree grid 0.4 track 0.45, remove dead copper): 95.425,-11.275 102.675,-11.275 102.675,-1.825 95.425,-1.825
no net on Bottom Paste (hatched 90Degree grid 0.4 track 0.45, remove dead copper): 88.95,-4.075 90.95,-4.075 90.95,-2.625 88.95,-2.625
no net on Bottom Paste (hatched 90Degree grid 0.4 track 0.45, remove dead copper): 104.025,0.82 111.625,0.82 111.625,-11.25 104.032,-11.25 104.032,1
POWER on Bottom Paste (hatched 90Degree grid 0.4 track 0.45, remove dead copper): 111.625,-0.545 97.55,-0.545 97.55,11.525 111.613,11.525 111.613,-0.725
DRAIN on Bottom Paste (hatched 90Degree grid 0.4 track 0.45, remove dead copper): 88.59,-14.1 88.59,-15.525 86.225,-15.525 86.225,-14.101 88.625,-14.101
NetR46_2 on Bottom Paste (hatched 90Degree grid 0.4 track 0.45, remove dead copper): 111.468,-12.71 111.468,-21.775 97.625,-21.775 97.625,-12.718 111.675,-12.718
POWER on Bottom Paste (hatched 90Degree grid 0.4 track 0.45, remove dead copper): 104.44,9.314 104.44,1.75 102.075,1.75 102.075,9.308 104.475,9.308
SOURCE on Bottom Paste (hatched 90Degree grid 0.4 track 0.45, remove dead copper): 96.633,-1.825 96.633,-18 90.45,-18 90.45,-1.839 96.725,-1.839
SOURCE on Bottom Paste (hatched 90Degree grid 0.4 track 0.45, remove dead copper): 78.475,-16.602 96.65,-16.602 96.65,-21.775 78.491,-21.775 78.491,-16.525
DRAIN on Bottom Paste (hatched 90Degree grid 0.4 track 0.45, remove dead copper): 86.79,1.025 86.79,-15.55 84.425,-15.55 84.425,1.011 86.825,1.011

## Keep-outs
Keep-Out Layer:
  lines w0.25: 40,-25 40,25 120,25 120,-25 40,-25

## Other copper
Top Layer:
  rectangle net VCC_DRV: 76.075,-4.725 79.1,-3.05

## Silkscreen, mask and mechanical layers (free items; w line width, h text height)
Top Overlay:
  lines w0.25: 111.825,-37.225 111.825,37.175
  lines w0.254: 76.825,-9.975 76.825,-3.9 ; 123,-34.95 123,35